# Altium PCB Power_BMS.PcbDoc (part 2 of 2)
Units mil, origin at the board's own origin, x right, y up, seen from the top; angles counter-clockwise.
Board outline 2370.27 x 1975.23 mil, 6 copper layers (Top Layer, Layer 1, GND, Power, Layer 2, Bottom Layer), stack 30.734 mil thick; 97 components, 67 nets, 345 pads, 132 vias.
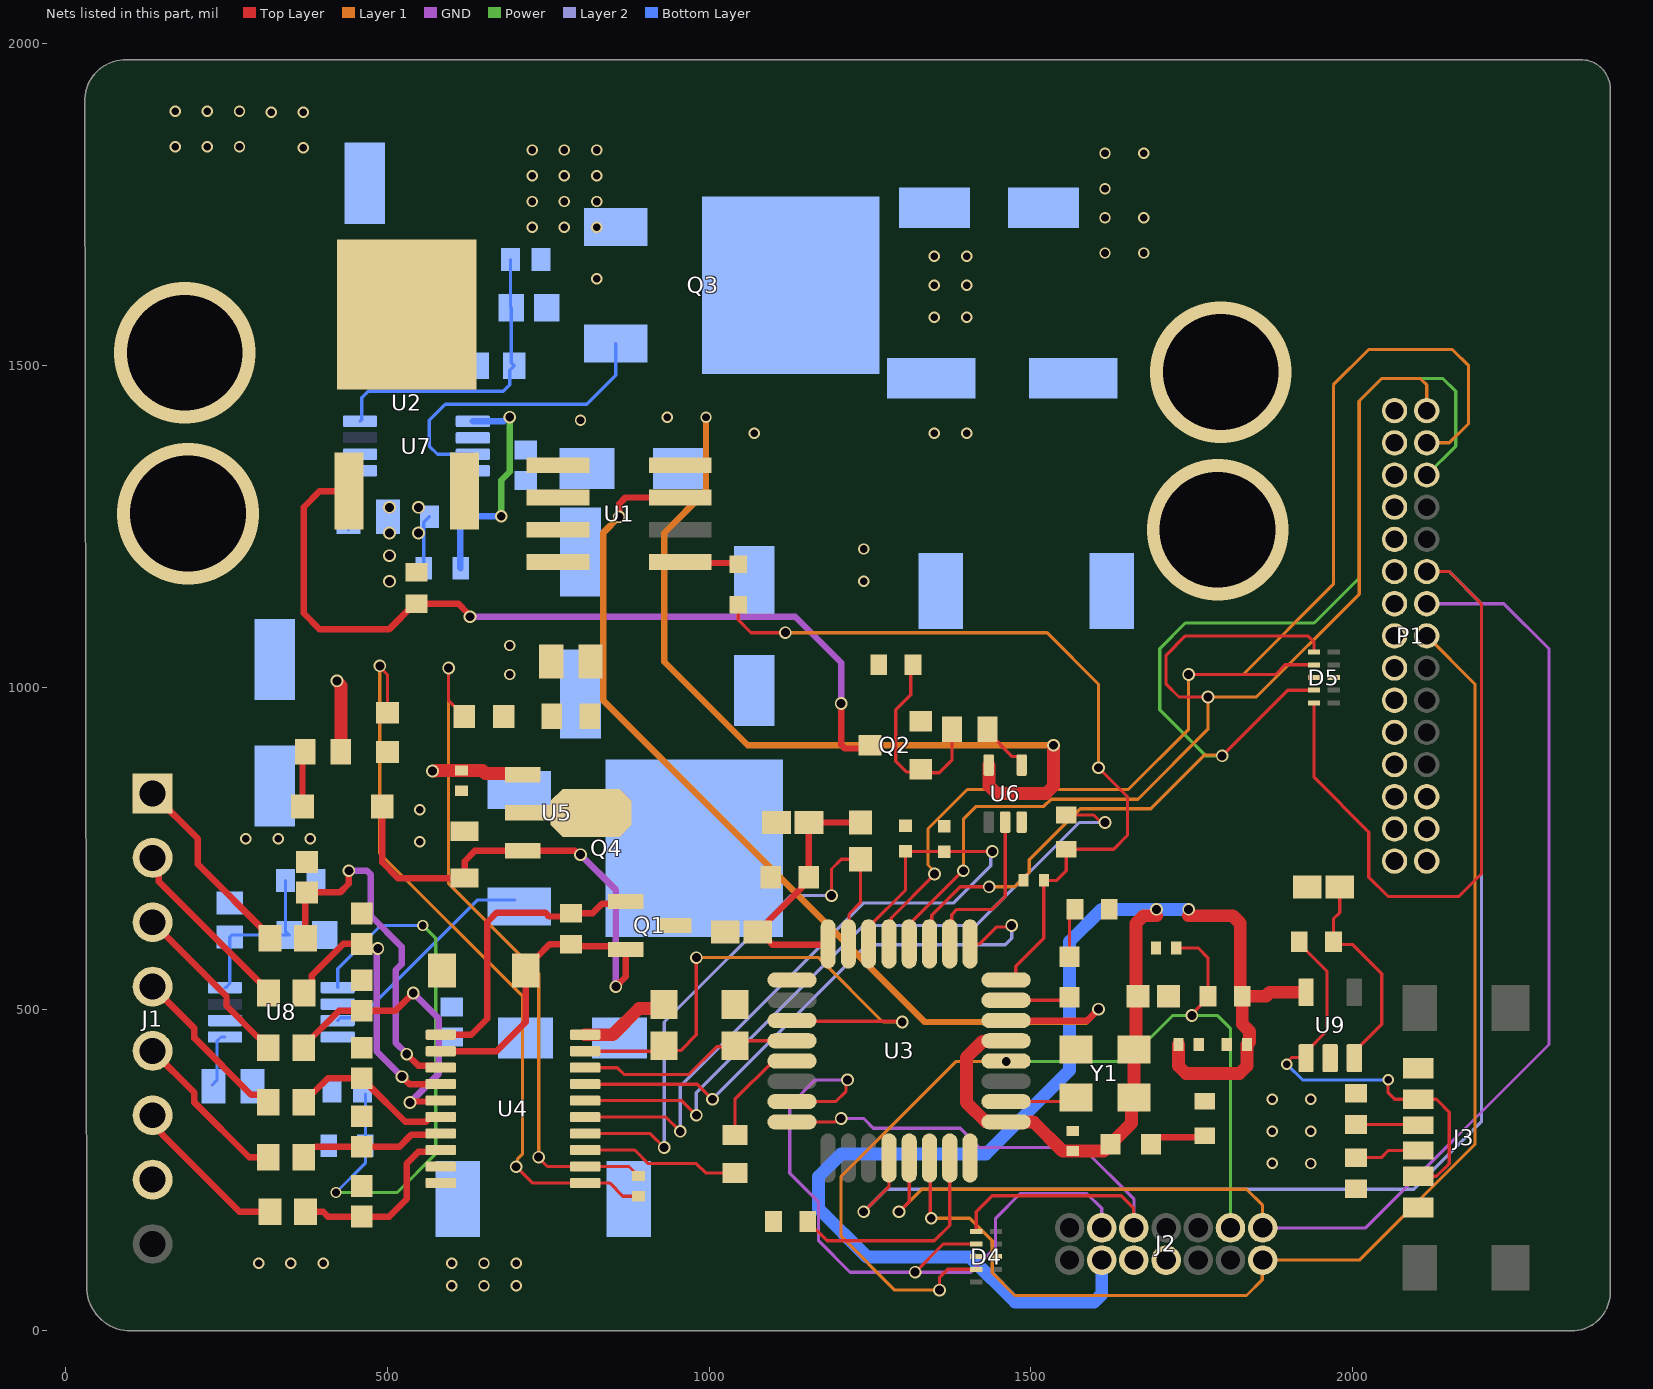
[diagram p6: the nets of this part, all layers, seen from the top]

## Part data (continued)
R6 R7 R8 R9 R10 R11: library part CMP-2000-03824-5, "Chip Resistor, 100 Ohm, +/- 1%, 100 mW,-55 to 155 degC, 0603 (1608 Metric), RoHS, Tape and Ree", Manufacturer="Vishay Semiconductor", ComponentLink1Description="Manufacturer URL", ComponentLink1URL=http://www.vishay.com/, ComponentLink2Description=Datasheet, ComponentLink2URL=http://www.vishay.com/docs/20035/dcrcwe3.pdf, DatasheetVersion=06/2012, Mounting Technology="Surface Mount", PackageDescription="2-Pin Surface Mount Device, Body 1.575 x 0.85 mm", PackageReference=0603
R12 R20: library part CMP-2000-01856-1, Manufacturer="KOA Speer", Part Number=RK73B1JTTD111J
R13 R15: library part CMP-2000-04828-3, "RES 1kΩ 1.00% 0.1W 0603", Case Code (Imperial)=0603, Case Code (Metric)=1608, Max Operating Temperature=155°C, Max Power Dissipation=100mW, Min Operating Temperature=-55°C, Package Quantity=1, Ratings=AEC-Q200, Resistance=1kR, Resistor Type="Thick Film", Temperature Coefficient=100ppm/°C, Tolerance=1%, Voltage Rating=50V, Case/Package=0603, Construction=Rectangular, Depth=0.8mm, Features="Moisture Resistant", Height=0.022inch, Lead Free="Lead Free", Length=0.063inch, Military Standard=Not, Number of Terminations=2, Packaging="Tape and Reel", Power Rating=100mW, RoHS Compliant=Yes, Series=AC, Size Code=0603, Termination=SMD/SMT, Width=0.031inch
R16 R17: library part CMP-2000-03059-2, "RES Thick Film, 200kΩ, 1%, 0.1W, 100ppm/°C, 0603", Case Code (Imperial)=0603, Case Code (Metric)=1608, Max Operating Temperature=155°C, Max Power Dissipation=100mW, Min Operating Temperature=-55°C, Package Quantity=10, Resistance=200kR, Temperature Coefficient=100ppm/°C, Tolerance=1%, Voltage Rating=75V, Case/Package=0603, Composition="Thick Film", Contact Plating=Tin, Depth=0.85mm, Features="Automotive AEC-Q200", Height=0.45mm, Lead Free="Lead Free", Length=1.55mm, Military Standard=Not, Mount="Surface Mount", Number of Terminations=2, Packaging="Tape and Reel", Power Rating=100mW, Radiation Hardening=No, Termination=SMD/SMT, Voltage Rating (DC)=75V, Weight=7.1E-05oz, Width=0.033inch, Working Voltage=75V
R19 R21: library part CMP-2100-03667-1, "Chip Resistor, 0 Ohm, +/- 5%, 0.1 W, -55 to 155 degC, 0603 (1608 Metric), RoHS, Tape and Reel", Case Code (Imperial)=0603, Case Code (Metric)=1608, Manufacturer=Yageo, Max Operating Temperature=155degC, Min Operating Temperature=-55degC, Package Description="2-Pin Surface Mount Device, Body 1.6 x 0.8 mm", Package Quantity=5000, Power Rating=100mW, Resistance=0mOhm, Temperature Coefficient=200ppm/degreesC, Tolerance=5%, Voltage Rating=50V, Case/Package=0603, Composition=ThickFilm, Contact Plating=Tin, Datasheet URL=http://www.yageo.com/NewPortal/yageodocoutput?fileName=/pdf/R-Chip/PYu-RC_Group_51_RoHS_L_5.pdf, Datasheet Version="Rev. 5, 10/2016", Depth=0.8mm, Height=0.45mm, Lead Free=LeadFree, Length=1.6mm, Manufacturer URL=http://www.yageo.com/, Military Standard=Not, Number of Pins=2, Package Reference=0603, Packaging=TapeandReel, Radiation Hardening=No, REACH SVHC=NoSVHC, RoHSCompliant=true, Termination=SMD/SMT, Voltage Rating (DC)=50V, Width=0.8mm
R23 R26: library part CMP-26527-007599-1, "RES 182K OHM 1% 1/10W 0603", Case Code (Imperial)=0603, Case Code (Metric)=1608, Max Operating Temperature=155°C, Max Power Dissipation=100mW, Min Operating Temperature=-55°C, Package Quantity=1, Ratings=AEC-Q200, Resistance=182kR, Resistor Type="Thick Film", Temperature Coefficient=100ppm/°C, Tolerance=1%, Case/Package=0603, Contact Plating=Tin, Features="Automotive AEC-Q200", Height=0.022inch, Lead Free="Lead Free", Length=0.061inch, Mount="Surface Mount", Number of Terminations=2, Packaging="Tape and Reel", Power Rating=100mW, Radiation Hardening=No, RoHS Compliant=Yes, Series=RMCF, Size Code=0603, Width=0.031inch
R24 R27: library part CMP-2000-00041-1, Manufacturer=Panasonic, Part Number=ERA3AEB333V
R25: library part CMP-2000-00318-1, Manufacturer=Panasonic, Part Number=ERJ-3EKF2002V
R28: library part CMP-2000-03860-1, Manufacturer="Vishay Dale", Part Number=CRCW060311K0FKEA
R30 R31: library part CMP-1012-00590-3, "RES Thick Film, 5.1kΩ, 1%, 0.1W, 100ppm/°C, 0603", Case Code (Imperial)=0603, Case Code (Metric)=1608, Max Operating Temperature=155°C, Min Operating Temperature=-55°C, Package Quantity=5000, Power Rating=100mW, Resistance=5.1kR, Temperature Coefficient=100ppm/°C, Tolerance=1%, Voltage Rating=75V, Case/Package=0603, Composition="Thick Film", Contact Plating=Tin, Depth=0.85mm, Height=0.45mm, Lead Free="Lead Free", Length=1.55mm, Military Standard=Not, Mount="Surface Mount", Packaging="Tape and Reel", Radiation Hardening=No, Termination=SMD/SMT, Voltage Rating (DC)=75V, Weight=7.1E-05oz, Width=0.85mm
R_NTC: library part CMP-05419-000001-1, "THERMISTOR NTC 10KOHM 3380K 0603", Case Code (Imperial)=0603, Case Code (Metric)=1608, Max Operating Temperature=125°C, Max Power Dissipation=100mW, Min Operating Temperature=-40°C, Package Quantity=4000, Resistance=10kR, Resistance Tolerance=1%, Accuracy=1%, Case/Package=0603, Depth=0.8mm, Height=0.8mm, Lead Free="Lead Free", Length=1.6mm, Mount="Surface Mount", Number of Pins=2, Packaging="Tape and Reel", Power Rating=100mW, Radiation Hardening=No, REACH SVHC="No SVHC", RoHS Compliant=Yes, Series=ERT-J, Termination=SMD/SMT, Tolerance=1%, Width=800um
R_sense R_sense_3v3 R_sense_5V: library part CMP-2001-03155-1, Manufacturer=Susumu, Part Number=RL1220S-R15-F
U1: "No Description Available", Mfr_Name="Texas Instruments", Supplier Part Number 1=296-TMCS1108A4BQDRCT-ND, RefDes=RefDes, Supplier 1=Digikey, Type=TYPE
U2: "No Description Available", Mfr_Name=onsemi, RefDes=RefDes, Type=Type
U3: library part CMP-0304-00067-2, "ARM Cortex-M0 32-bit MCU, 32 KB Flash, 4 KB Internal RAM, 26 I/Os, 32-Pin LQFP, -40 to 85 degC, Tape and Reel", I/Os (High Current)=26, Manufacturer=STMicroelectronics, Operating Frequency(F) (Processor speed) (MHz)=48, Package Description="32-Pin Low Profile Quad Flat Package, 7 x 7 mm Body, 0.8 mm Pitch", Package Reference=LQFP32, Supply Voltage(Vcc) min (V)=2.4, ComponentLink1Description="Manufacturer URL", ComponentLink1URL=http://www.st.com/, ComponentLink2Description=Datasheet, ComponentLink2URL=http://www.st.com/st-web-ui/static/active/en/resource/technical/document/datasheet/DM00088500.pdf, Core="ARM Cortex-M0", DatasheetVersion="Rev. 2", FLASH Size (Prog) (kB)=32, Internal RAM Size (kB)=4, Mounting Technology="Surface Mount", Packing="Tape and Reel", PartNumber=STM32F030K6T6TR
U4: library part CMP-0321-00736-2, "Analog Front End for 3 to 6 Series Lithium-Ion Cells, -25 to 85 degC, 20-pin TSSOP (PW), Green (RoHS & no Sb/Br)", Manufacturer="Texas Instruments", Over Voltage Protection=N, Code_JEDEC=MO-153, ComponentLink1Description=Datasheet, ComponentLink1URL=http://www.ti.com/general/docs/lit/getliterature.tsp?genericPartNumber=BQ76925&fileType=pdf, DatasheetVersion=SLUSAM9B, Eco-Plan="Green (RoHS & no Sb/Br)", Lead Acid=N, Li-Ion=Y, Li-Polymer=Y, Mounting Technology="Surface Mount", NiCd=N, NiMH=N, PackageDescription="20-Pin Plastic Thin Small Outline Package 6.5 x 4.4 mm Body ,0.65 mm Pitch", PackageReference=PW0020A, PackageVersion="revG, Feb-2011", PartNumber=BQ76925PWR, SubFamily="Lithium Ion Protection"
U5: library part CMP-0244-00410-1, "Positive Voltage Regulator, 3.3V, 4-Pin SOT-89, Tape and Reel", ComponentLink1Description="Manufacturer URL", ComponentLink1URL=http://www.st.com, ComponentLink2Description=Datasheet, ComponentLink2URL=http://www.st.com/internet/com/TECHNICAL_RESOURCES/TECHNICAL_LITERATURE/DATASHEET/CD00000446.pdf, DatasheetVersion=1/02/2011, PackageDescription="3-Pin SOT-89 Package 1.5 mm Pitch, 4.1 mm Lead Span", PackageReference=SOT-89, PackageVersion=2011
U6: library part CMP-0859-00252-3, "Single Inverter, DCK0005A, LARGE T&R", F @ Nom Voltage(Max)(Mhz)=150, Generic Part Number=SN74LVC1G04, ICC @ Nom Voltage(Max)(mA)=0.01, Manufacturer="Texas Instruments", Operating Temperature Range(C)="-40 to 125,-40 to 85", Rating=Catalog, tpd @ Nom Voltage(Max)(ns)=7.5,5.2,4.2,3.7, Voltage(Nom)(V)=1.8,2.5,3.3,5, 3-State Output=No, Bits(#)=1, DatasheetVersion=SCES214AD, Input Type=CMOS/TTL, Logic=Inverting, Output Drive (IOL/IOH)(Max)(mA)=32/-32, Output Type=CMOS, PackageReference=DCK0005A, Schmitt Trigger=No, Sub-Family="Inverting Buffer/Driver", Technology Family=LVC, VCC(Max)(V)=5.5, VCC(Min)(V)=1.65
U7 U8: library part CMP-0069-01740-3, "Hysteretic PFET Buck Controller with Enable Pin, 8-pin MSOP, Pb-Free", Manufacturer="Texas Instruments", PackageTopMarking=ZXTT*SKSB, PowerWise=N, Code_JEDEC=MO-187-AA, ComponentLink1Description="Datasheet URL", ComponentLink1URL=http://www.ti.com/general/docs/lit/getliterature.tsp?genericPartNumber=LM3489&fileType=pdf, CompType=Switcher, PackageDescription="MINI SOIC, .118 x .118 x .034in, 8 Lead, .0256in Pitch", PackageReference=DGK0008A, PinCount=8, RoHS=Y
U9: library part CMP-04917-000053-1, "IC REG LINEAR 3.3V 300MA SOT23-5", Dropout Voltage=125mV, Manufacturer="Texas Instruments", Max Junction Temp=+125°C, Max Supply Voltage=5.5V, Min Supply Voltage=1.4V, Nominal Supply Current=34uA, Output Current=300mA, Output Voltage=3.3V, Package=DBV0005A, Temperature="-40°C to +125°C", Temperature Range Low=-40°C, Accuracy Percentage=1%, Automotive=No, Category=IC, ComponentLink2Description=Datasheet, ComponentLink2URL=http://www.ti.com/lit/ds/symlink/tlv733p.pdf, Device Class L1="Integrated Circuits (ICs)", Device Class L2="Power Management ICs", Device Class L3="Voltage Regulators - Linear", Digikey Description="IC REG LINEAR 3.3V 300MA SOT23-5", Height=1.45mm, Lead Free=Yes, Manufacturer Part Number=TLV73333PDBVR, Mouser Description="LDO Voltage Regulators Capacitr-Free 300-mA 5-SOT-23 -40 to 125", Number Of Outputs=1, Octopart=https://octopart.com/tlv73333pdbvr-texas+instruments-51080890, Output Type=Fixed, RoHS=TRUE, Standoff Height=0mm, Temperature Range High=+125°C
Y1: "8 MHz XO (Standard) HCMOS Oscillator 1.62V ~ 3.63V Enable/Disable 4-SMD, No Lead", Package="ECS-3225MV-0-4 ECS", Check_prices=https://www.snapeda.com/parts/ECS-3225MV-080-BN-TR/ECS/view-part/?ref=eda, MF="ECS Inc.", MP=ECS-3225MV-080-BN-TR, SnapEDA_Link=https://www.snapeda.com/parts/ECS-3225MV-080-BN-TR/ECS/view-part/?ref=snap

## Via types
v1: diameter 17.72, hole 11.81, Top Layer to Bottom Layer, 69 vias
v2: diameter 19.68, hole 13.78, Top Layer to Bottom Layer, 56 vias
v3: diameter 220, hole 180, Top Layer to Bottom Layer, 4 vias
v4: diameter 124.02, hole 124.02, Top Layer to Bottom Layer, 3 vias

## Nets (pads, with @x,y where several pads share a name; then routed paths per layer and width w, separated by ;. In a path a pad name is that pad's centre, name@x,y a point inside that pad or via, vN(x,y) a via of type N, cw(c..) or ccw(c..) an arc to the next point about the centre after c; other vN are vias at no path point)
3v3_OUT: C22.1 C24.2 C27.1 L1.2 P1.26 P1.27 R24.2
  other v1: 825,1635 1615,1675 1675,1675 1615,1730 1675,1730 1615,1775 1615,1830 1675,1830
5V_IN: J3.A9 J3.B9 R29.2 U9.1 | length 685.2
  Top Layer w5: v1(1897.77,414.18) 1897.77,417.63 1905,424.85 1926.57,424.85 U9.1@1927.6,423.82 1927.6,433.66 1960,466.06 1960,558.7 1916.72,601.98 R29.2@1916.72,605 ; v1@2055,395 v1(2055,390) 2055,370 2065.16,359.84 J3.A9@2101.89,359.84 2130.16,359.84 2150,340 2150,260 2130.16,240.16 J3.B9@2101.89,240.16
  Bottom Layer w5: v1(1897.77,414.18) 1921.96,390 v1(2055,390)
5V_OUT: C30.1 C31.2 C33.1 L2.2 P1.29 P1.30 R27.2
  other v1: 600,70 650,70 700,70 600,105 650,105 700,105 1875,260.37 1935,260 1875,310.26 1935,310.26 1875,360 1935,360 550,760 550,810
+3V3: C1.2 C2.2 C3.2 C4.2 C5.2 C19.2 C21.2 C34.2 D1.2 J2.11 Q1.3 R2.1 R4.2 R5.2 U1.8 U3.1 U3.5 U3.17 U4.20 U5.1 U6.5 U9.5 Y1.1 Y1.4 | length 4397.6
  Top Layer w20: v2@575,870 575.75,870.75 C21.2@615,870.75 647.76,870.75 652.64,865.87 708.39,865.87 U5.1@710.2,864.06 ; U4.20@807.2,460.16 850.16,460.16 890.81,500.81 923.71,500.81 R5.2@930,507.1 ; C4.2@1102.3,787.74 C4.2@1104.56,790 ; U6.5@1434.41,879.29 1435,878.7 1435,846.72 1446.72,835 1523.28,835 1535,846.72 v2(1535,910) ; U3.1@1466.53,325.46 1429.21,325.46 1400,354.66 1400,425 1425.06,450.05 1475.65,450.05 U3.5@1476.28,450.69 ; U3.1@1476.34,324.76 1503.89,324.76 1549.41,279.25 C1.2@1565,279.25 1612.76,279.25 D1.2@1623.5,290 1656.28,322.78 1656.28,358.61 Y1.4@1660.28,362.6 Y1.1@1660.28,437.4 1663.32,440.44 1663.32,633.28 1675.03,645 1695,645 ; C2.2@1729.25,445 1729.25,411.72 1740.97,400 1824.03,400 1835.75,411.72 C34.2@1835.75,445 1839.59,448.84 1839.59,465.41 1828.28,476.72 R2.1@1828.28,520 ; 1745,645 1813.6,645 1825.32,633.28 1825.32,522.97 R2.1@1828.28,520 ; U9.5@1927.6,526.18 1871.18,526.18 1865,520 R2.1@1828.28,520
  Layer 1 w10: v1(995,1420) 995,1305 930,1240 930,1040 1060,910 v2(1535,910)
  Bottom Layer w20: J2.11@1610,111.82 1610,56.72 1598.28,45 1475,45 1405,115 1245,115 1170,190 1170,239.96 1205.04,275 1430,275 1560,405 1560,605 1610,655 v2(1695,655) v2(1745,655)
  other v1: 935,1420
  other v2: 570,870
ADC_REF: U3.9 U4.17 | length 872.7
  Top Layer w5: U4.17@807.2,383.39 981.61,383.39 v2(1005,360) ; U3.9@1405.24,601.34 1420.18,601.34 1446.55,627.71 1467.71,627.71 v2(1470,630)
  Layer 2 w5: v2(1005,360) 1245,600 1460,600 1470,610 v2(1470,630)
ADJ_3v3: C26.2 R23.1 U7.5 | length 365.1
  Power w10: v2(676.74,1265.93) 676.74,1321.74 690,1335 v2(690,1420)
  Bottom Layer w10: R23.1@613.54,1185 612.89,1185.65 612.89,1264.35 C26.2@612.24,1265 613.17,1265.93 v2(676.74,1265.93) ; U7.5@632.6,1413.39 680.77,1413.39 687.38,1420 v2(690,1420)
ADJ_5V: C32.2 R26.1 U8.5 | length 904.5
  Power w5: v1(420,215) 515,215 575,275 575,610 v1(555,630)
  Bottom Layer w5: v1(420,215) 465.75,260.75 C32.2@465.75,367.87 ; U8.5@422.6,533.39 422.6,562.6 490,630 v1(555,630)
BAT_VOLTAGE: C17.1 C20.1 D3.1 Q1.2 R16.1 U4.2 U5.3 | length 1137
  Top Layer w10: D3.1@492.01,815 492.01,727.99 516.42,703.58 C20.1@620,703.58 620,730 635.94,745.94 U5.3@710.2,745.94 791.43,745.94 797.38,740 v2(800,740) ; U4.2@582.8,434.57 669.57,434.57 714.96,479.96 C17.1@714.96,560 714.96,564.92 731.61,581.57 732.74,581.57 751.93,600.77 R16.1@785,600.77 788.17,597.6 Q1.2@867.6,597.6 ; v2(855,535) 870.2,550.2 Q1.2@870.2,592.6
  GND w10: v2(800,740) 855,685 v2(855,535)
Cell_1: C11.1 R6.2 U4.8 | length 288.4
  Top Layer w10: R6.2@372.56,185 400,185 407.42,177.58 C11.1@460,177.58 502.58,177.58 530,205 530,260 548.15,278.15 579.92,278.15 U4.8@582.8,281.02
Cell_2: C12.1 R7.2 U4.7 | length 223.1
  Top Layer w10: R7.2@372.56,275.51 382.72,285.67 387.95,285.67 388.57,286.29 518.71,286.29 537.42,305 581.18,305 U4.7@582.8,306.61
Cell_3: C13.1 R8.2 U4.6 | length 250.2
  Top Layer w10: R8.2@377.72,362.72 377.72,365.67 382.72,370.67 385.67,370.67 407.58,392.58 460.09,392.58 471.97,380.7 471.97,380.61 527.58,325 559.84,325 567.05,332.2 U4.6@582.8,332.2
Cell_4: C14.1 R9.2 U4.5 | length 458.1
  Top Layer w10: R9.2@370,442.95 424.63,497.58 C14.1@460,497.58 512.58,497.58 v2(540,525) ; v2(535,355) 536.4,356.4 581.4,356.4 U4.5@582.8,357.8
  GND w10: v2(535,355) 580,400 580,485 v2(540,525)
Cell_5: C15.1 R10.2 U4.4 | length 439.8
  Top Layer w10: R10.2@370.12,525 382.36,537.24 382.36,552.36 431.29,601.29 C15.1@460,601.29 467.13,594.16 v2(485.13,594.16) ; v2(522.62,395) 534.23,383.39 U4.4@582.8,383.39
  GND w10: v2(485.13,594.16) 483.47,592.5 483.47,564.68 483.11,564.32 483.11,434.51 v2(522.62,395)
Cell_6: C16.1 R11.2 U4.3 | length 571
  Top Layer w10: R11.2@372.56,610 372.56,678.85 C16.1@375,681.29 426.29,681.29 440,695 v2(440,715) ; v2(530,430) 548.15,411.85 579.92,411.85 U4.3@582.8,408.98
  GND w10: v2(440,715) 468.24,715 474.09,709.14 474.09,644.91 521.89,597.11 521.89,569.5 512.64,560.25 512.64,447.78 530,430.42 v2(530,430)
Cell_Voltage_ADC: C10.1 C36.1 U3.14 U4.15 | length 1165.1
  Top Layer w5: U4.15@807.2,332.2 932.8,332.2 v2(955,310) ; U3.14@1250,610 1250,630 1305,685 1305,740.63 1309.37,745 v2(1440,745)
  Layer 2 w5: v2(955,310) 955,380 1240,665 1380,665 1437.66,722.66 1437.66,742.66 v2(1440,745)
Current_ADC_MCU: U1.7 U3.6 | length 1530.9
  Top Layer w10: v2@860,1270 860,1285 870,1295 U1.7@955.02,1295 ; U3.6@1476.34,482.24 1587.24,482.24 v2(1605,500)
  Layer 1 w10: v2(860,1265) 835,1240 835,980 1335,480 1585,480 v2(1605,500)
Current_Voltage_ADC: C9.1 U3.15 U4.14 | length 899.9
  Top Layer w5: U4.14@807.2,306.61 908.39,306.61 v2(930,285) ; v2(1190,676.39) 1190,717.78 1205,732.78 C9.1@1235,732.78 1235,665 1217.22,647.22 1217.22,602.3 U3.15@1216.26,601.34
  Layer 2 w5: v2(930,285) 930,480 1126.39,676.39 v2(1190,676.39)
Fault_Alert: R21.1 U3.21 | length 172.6
  Top Layer w5: R21.1@1040,304.53 1040,360 1099.25,419.25 U3.21@1128.66,419.25
  Top Layer w10: R21.1@1040,304.53 R21.1@1043.94,304.53
FB_3v3: C27.2 R24.1 R25.2 U7.4 | length 476.3
  Bottom Layer w5: U7.4@457.4,1413.39 460,1415.98 460,1450 470,1460 680,1460 690,1470 690,1492.91 R25.2@697.09,1500 692.44,1504.65 R24.1@692.44,1590 691.38,1591.06 C27.2@691.38,1665
FB_5V: C33.2 R27.1 R28.2 U8.4 | length 263.6
  Bottom Layer w5: U8.4@247.4,533.39 248.64,533.39 255,539.74 R28.2@255,611.85 258.15,615 R27.1@347.44,615 341.38,621.06 C33.2@341.38,700
GND: C1.1 C2.1 C3.1 C4.1 C5.1 C6.1 C9.2 C10.2 C11.2 C12.2 C13.2 C14.2 C15.2 C16.2 C17.2 C19.1 C20.2 C21.1 C34.1 C35.1 C36.2 C_th.1 D4.3 D4.8 J1.7 J2.7 J2.9 J3.A12 J3.B12 Q2.2 R1.1 R3.1 R15.1 R18.1 R19.1 R22.1 R30.1 R31.2 R_NTC.1 R_sense.1 U1.5 U3.16 U3.32 U4.9 U4.10 U5.2 U6.3 U9.2 Y1.2 | length 500.3
  Top Layer w10: U1.5@955.02,1195 956.78,1193.25 1043.25,1193.25 R_NTC.1@1045,1191.5 ; C19.1@1075.22,620 C19.1@1079.53,620 ; C5.1@1154.53,705 1155,705.47 C4.1@1155,790 C9.2@1244.44,790 ; C5.1@1155.51,704.02 1143.78,692.28 1143.78,688.56 1092.48,637.27 1092.48,632.96 C19.1@1079.53,620 ; U3.16@1184.76,601.34 1183.64,600.22 1098.34,600.22 1092.48,606.08 1092.48,607.04 C19.1@1079.53,620
  other v3: 190,1270
"High_Side Switching": U3.10 U6.2 | length 257.3
  Top Layer w5: U3.10@1373.74,601.34 1376.89,604.49 1376.89,646.89 1385,655 1440,655 1460,675 U6.2@1460,790.71
I2C1_SCL: R5.1 U3.19 U4.19 | length 862.3
  Top Layer w5: U4.19@807.2,434.57 915,434.57 921.67,434.57 R5.1@925,434.57 ; R5.1@930,442.9 937.42,435.48 955.48,435.48 980,460 v2(980,580) ; U3.19@1128.66,482.24 1129.78,481.12 1298.88,481.12 v2(1300,480) v2@1299.29,479.29
  Top Layer w10: R5.1@915,445 915,434.57 915,427.9 R5.1@921.67,434.57
  Layer 1 w5: v2(980,580) 1170,580 1270,480 v2(1300,480)
I2C1_SDA: R4.1 U3.20 U4.18 | length 392.9
  Top Layer w5: U4.18@807.2,408.98 857.24,408.98 867.83,398.39 968.39,398.39 1011.46,441.46 R4.1@1040,441.46 ; R4.1@1056.63,426.27 R4.1@1040,442.9 1047.85,450.75 U3.20@1128.66,450.75
  Top Layer w10: R4.1@1040,441.46 R4.1@1055.91,425.55
ISEN1: R_sense_3v3.2 U7.1 | length 99
  Bottom Layer w5: R_sense_3v3.2@439.49,1245 439.49,1299.49 457.4,1317.4 U7.1@457.4,1336.61
ISEN2: R_sense_5V.2 U8.1 | length 86.4
  Bottom Layer w5: R_sense_5V.2@227.4,382.09 235,389.68 235,450.26 241.36,456.61 U8.1@247.4,456.61
Master_CS: D5.5 P1.12 U3.28 | length 3062.4
  Top Layer w5: v2(1240,185) 1279.25,224.25 U3.28@1279.25,268.66 ; D5.5@1940,975.94 1940,860 2025,775 2025,705 2055,675 2165,675 2200,710 2200,1130 2150,1180 P1.12@2115,1180
  Layer 2 w5: v2(1240,185) 1275,220 2095,220 2200,325 2200,1130 2150,1180 P1.12@2115,1180
MCU_Bootloader: R1.2 U3.31 | length 347.6
  Top Layer w5: R1.2@1153.28,170 1183.28,140 1350,140 1373.74,163.74 U3.31@1373.74,268.66
MCU_NRST: C6.2 D4.4 J2.4 R2.2 U3.4 | length 1545.2
  Top Layer w5: v2(1357.78,63.35) 1357.78,82.78 1370.63,95.63 D4.4@1415,95.63 ; C6.2@1725.75,595 1760,595 1775,580 R2.2@1775,520 1775,516.98 1750,491.98 v2(1750,490)
  Power w5: v2(1461.66,418.8) 1648.8,418.8 1720,490 v2(1750,490) 1790,490 1810,470 J2.4@1810,160
  Layer 1 w5: v2(1357.78,63.35) 1288.35,63.35 1205,146.7 1205,240 1383.8,418.8 v2(1461.66,418.8)
MCU_SWCLK: D4.1 J2.10 U3.24 | length 939.2
  Top Layer w5: U3.24@1143.66,324.76 1195.79,324.76 1201.03,330 v2(1205,330) ; D4.1@1415,154.69 1415,185 1440,210 1640,210 1659.5,190.5 1659.5,160.5 J2.10@1660,160
  GND w5: v2(1205,330) 1240,330 1255,315 1390,315 1420,285 1580,285 1660,205 J2.10@1660,160
MCU_SWDIO: D4.2 J2.12 U3.23 | length 1119.6
  Top Layer w5: U3.23@1143.66,356.26 1196.26,356.26 1212.66,372.66 1212.66,387.66 v2(1215,390) ; v2(1320,91.26) 1363.74,135 D4.2@1415,135
  GND w5: v2(1215,390) 1165,390 1125,350 1125,245 1170,200 1170,140 1218.76,91.24 1406.24,91.24 1445,130 1445,175 1483.47,213.47 1586.97,213.47 1610,190.44 J2.12@1610,160
NetC35_2: C35.2 R29.1 U9.3 | length 333.7
  Top Layer w5: C35.2@1980,690 1980,650 1970,640 R29.1@1970,605 1974.53,600.47 1999.53,600.47 2045,555 2045,476.26 2002.4,433.66 U9.3@2002.4,423.82
NetCR1_1: CR1.1 L1.1 Q3.4
NetCR2_1: CR2.1 L2.1 Q4.4
NetD1_1: D1.1 R3.2 | length 87.9
  Top Layer w10: D1.1@1686.5,290 1697.1,300.61 R3.2@1770,300.61
NetD2_1: D2.1 R18.2 | length 77
  Top Layer w5: D2.1@1560,581.5 1560,646.64 R18.2@1568.36,655
NetD3_2: D3.2 R12.2 | length 86.8
  Top Layer w10: D3.2@367.99,815 367.99,895.55 R12.2@372.44,900
NetJ1_1: J1.1 R11.1 | length 300.6
  Top Layer w10: J1.1@135,835 205,765 205,725.39 317.44,612.95 R11.1@317.44,610
NetJ1_2: J1.2 R10.1 | length 301.3
  Top Layer w10: J1.2@135,735 144.91,725.09 144.91,698.04 315,527.95 R10.1@315,525 R10.1@303.14,536.86
NetJ1_3: J1.3 R9.1 | length 271.4
  Top Layer w10: J1.3@115,639.88 J1.3@115,640 ; J1.3@135,635 249.88,520.12 249.88,505 299.21,455.67 302.17,455.67 314.88,442.95 R9.1@314.88,440
NetJ1_4: J1.4 R8.1 | length 263.2
  Top Layer w10: J1.4@135,535 200,470 200,455 288.02,366.98 302.91,366.98 R8.1@314.88,355
NetJ1_5: J1.5 R7.1 | length 259.6
  Top Layer w10: J1.5@135,435 200,370 200,355 285,270 R7.1@314.88,270 R7.1@317.44,270
NetJ1_6: J1.6 R6.1 | length 253.4
  Top Layer w10: J1.6@135,335 135,320.98 149.96,306.02 149.96,305.04 270,185 R6.1@317.44,185
NetJ3_A5: J3.A5 R31.1 | length 101.5
  Top Layer w5: R31.1@2005,269.23 2044.23,269.23 2055.31,280.32 J3.A5@2101.89,280.32
NetJ3_B5: J3.B5 R30.2 | length 97.3
  Top Layer w5: R30.2@2005,320.77 2100.8,320.77 J3.B5@2101.89,319.68
NetQ2_1: Q2.1 R20.2 R22.2 | length 313
  Top Layer w5: R22.2@1313.28,1035 1313.28,988.28 1290,965 1290,885 1306.45,868.55 1327.63,868.55 1328.74,867.44 1357.44,867.44 1377.44,887.44 R20.2@1377.44,935 ; R20.2@1377.44,948.25 R20.2@1377.44,951.06
NetQ2_3: Q2.3 R17.1 U2.1 | length 1317.1
  Top Layer w10: U2.1@440,1305 395,1305 370,1280 370,1115 395,1090 502.33,1090 542.5,1130.17 R17.1@545,1130.17 609.83,1130.17 v2@625,1115 ; v2(1205,975) 1205,910.86 1210.86,905 Q2.3@1252.09,905
  GND w10: v2(628.15,1109.76) 1133.59,1109.76 1205,1038.35 v2(1205,975)
NetR20_1: R20.1 U6.4 | length 83
  Top Layer w5: R20.1@1432.56,935 1432.56,931.06 1471.19,892.43 1480.22,892.43 1485.59,887.06 U6.4@1485.59,879.29
NetR21_2: R21.2 U4.13 | length 247.5
  Top Layer w5: U4.13@807.2,281.02 883.98,281.02 905,260 980,260 994.53,245.47 R21.2@1040,245.47
Pack+: R12.1 U1.1 U1.2 | length 106.1
  Top Layer w20: v2@425,1005 427.56,1002.44 R12.1@427.56,900
  other v1: 800,1415 369.38,1838.55 170,1840 220,1839.79 270,1840 319.38,1893.55 369.38,1893.55 170,1895 220,1895 270,1895
  other v2: 421.5,1010.05
  other v3: 185,1520
"Pack+ Sensor Out": R17.2 U1.3 U1.4 U2.3 | length 2.5
  Top Layer w20: R17.2@545,1178.63 R17.2@547.5,1178.63
Pack-: C22.2 C23.1 C24.1 C25.2 C28.1 C29.2 C30.2 C31.1 CR1.2 CR2.2 D5.3 D5.8 P1.1 P1.3 P1.5 P1.7 P1.9 P1.11 P1.13 P1.15 P1.17 P1.19 P1.21 P1.23 P1.25 P1.28 R13.1 R19.2 R25.1 R28.1 R_sense.2 U7.2 U7.6 U8.2 U8.6 | length 1.4
  Top Layer w20: R_sense.2@754.49,1040 R_sense.2@754.98,1039.51 ; R19.2@754.98,955.49 R19.2@755.47,955
  other v1: 690,1020 690,1065 1240,1165 1240,1215 1070,1395 1350,1395 1400,1395 1350,1575 1400,1575 1350,1625 1400,1625 1350,1670 1400,1670
  other v3: 1790,1245
PFET1_Gate: Q3.1 U7.7 | length 481.3
  Bottom Layer w5: U7.7@632.6,1362.2 577.8,1362.2 565,1375 565,1415 590,1440 810,1440 854.88,1484.88 Q3.1@854.88,1534.45
PFET2_Gate: Q4.1 U8.7 | length 353.3
  Bottom Layer w5: U8.7@422.6,482.2 427.07,486.67 456.67,486.67 639.45,669.45 Q4.1@698.35,669.45
SENSEN: C18.1 R15.2 U4.11 | length 1160.5
  Top Layer w5: v2@487.42,1032.58 500,1020 R15.2@500,960.58 ; v2(700,255) 725.16,229.84 845.16,229.84 865.75,209.25 C18.1@890,209.25
  Layer 1 w5: v2(488.19,1033.34) 488.19,741.81 710,520 710,275 702.26,267.26 702.26,257.26 v2(700,255)
SENSEP: C18.2 R13.2 U4.12 | length 1074.6
  Top Layer w5: v2@595,1033.77 v2(595,1030) 595,979.42 R13.2@619.42,955 ; v2(735,270) 735,268.93 748.49,255.43 U4.12@807.2,255.43 875.31,255.43 C18.2@890,240.75
  Layer 1 w5: v2(595,1030) 595,695 735,555 v2(735,270)
SPI1_CLK: D5.4 P1.6 U3.11 | length 1969
  Top Layer w5: U3.11@1342.24,601.34 1345.81,604.9 1345.81,645.81 1390,690 v2(1435,690) ; v2(1797.05,893.52) 1899.17,995.63 D5.4@1940,995.63
  Power w5: v2(1797.05,893.52) 1771.48,893.52 1700,965 1700,1060 1740,1100 1940,1100 2010,1170 2010,1445 2045,1480 2140,1480 2160,1460 2160,1375 P1.6@2115,1330
  Layer 1 w5: v2(1435,690) 1475,690 1497.34,712.34 1497.34,732.34 1576.28,811.28 1686.28,811.28 1770,895 v2@1795,895
SPI1_MISO: D5.1 P1.2 U3.12 | length 1862.3
  Top Layer w5: U3.12@1310.75,601.34 1310.75,631.96 1393.79,715 v2(1395,715) ; v2(1775,985) 1730,985 1710,1005 1710,1050 1740,1080 1930,1080 1940,1070 D5.1@1940,1054.69
  Layer 1 w5: v2(1395,715) 1395,795 1415,815 1520,815 1531.28,826.28 1666.28,826.28 1775,935 v2(1775,985) 1850,985 2010,1145 2010,1445 2045,1480 2105,1480 2115,1470 P1.2@2115,1430
SPI1_MOSI: D5.2 P1.4 U3.13 | length 1971.1
  Top Layer w5: U3.13@1279.25,601.34 1282.82,604.9 1282.82,641.6 1350,708.79 v2(1350,710) ; v2(1745,1020) 1880,1020 1895,1035 D5.2@1940,1035
  Layer 1 w5: v2(1350,710) 1350,713.97 1340,723.97 1340,780 1401.28,841.28 1651.28,841.28 1745,935 v2(1745,1020) 1830,1020 1970,1160 1970,1470 2025,1525 2155,1525 2180,1500 2180,1410 2150,1380 P1.4@2115,1380
Status_LED_Control: D2.2 U3.7 | length 85.6
  Top Layer w5: U3.7@1476.34,513.74 1555.24,513.74 D2.2@1560,518.5
Temp_ADC_MCU: C_th.2 R_NTC.2 R_th.1 U3.8 | length 1229.9
  Top Layer w5: R_NTC.2@1045,1128.5 1045,1105 1065,1085 v2(1118.39,1085) ; U3.8@1476.34,545.24 1476.34,566.34 1520,610 C_th.2@1520,700 1540,700 1555,715 R_th.1@1555,748.36 1628.36,748.36 1650,770 1650,830 v2(1605,875)
  Layer 1 w5: v2(1118.39,1085) 1525,1085 1605,1005 v2(1605,875)
Thermistor_Bias: R_th.2 U4.16 | length 1093.4
  Top Layer w5: U4.16@807.2,357.8 957.2,357.8 v2(980,335) ; R_th.2@1553.36,800 R_th.2@1554.18,800.82 ; R_th.2@1555,801.64 1597.25,801.64 1608.9,790 v2(1615,790)
  Top Layer w10: R_th.2@1554.18,800.82 R_th.2@1555,801.64
  Layer 2 w5: v2(980,335) 980,370 1240,630 1415,630 1575,790 v2(1615,790)
Transistor_CTL: Q1.1 R16.2 U4.1 | length 465
  Top Layer w10: U4.1@582.8,460.16 630.16,460.16 655,485 655,635 670,650 745,650 751.09,643.91 782.31,643.91 R16.2@784.96,646.57 ; R16.2@785,649.23 819.23,649.23 833.51,663.51 866.3,663.51 Q1.1@870.2,667.4
UART_RX: J2.1 P1.16 U3.30 | length 1954.8
  Top Layer w5: U3.30@1342.24,268.66 1343.62,267.28 1343.62,176.38 v2(1345,175)
  Layer 1 w5: v2(1345,175) 1405,175 1440,140 1440,90 1475,55 1835,55 1859.5,79.5 1859.5,109.5 J2.1@1860,110 2010,110 2190,290 2190,1005 P1.16@2115,1080
UART_TX: J2.2 P1.14 U3.29 | length 2112.1
  Top Layer w5: v2(1295,185) 1310.75,200.75 U3.29@1310.75,268.66
  GND w5: J2.2@1860,160 2020,160 2305,445 2305,1060 2235,1130 P1.14@2115,1130
  Layer 1 w5: v2(1295,185) 1330,220 1835,220 1860,195 J2.2@1860,160
VIN: C23.2 C25.1 C26.1 C28.2 C29.1 C32.1 Q3.3 Q4.3 R23.2 R26.2 R_sense_3v3.1 R_sense_5V.1 U2.4 U7.8 U8.8 | length 83.5
  Bottom Layer w5: R23.2@556.46,1185 556.46,1256.46 C26.1@565,1265
  other v1: 300,105 350,105 400,105 280,765 330,765 380,765 725,1715 775,1715 825,1715 725,1755 775,1755 825,1755 725,1795 775,1795 825,1795 725,1835 775,1835 825,1835
  other v2: 503.15,1164.76 503.15,1204.76 503.15,1239.76 548.15,1239.76 503.15,1279.76 548.15,1279.76
  other v3: 1795,1490
XTAL: U3.2 Y1.3 | length 96
  Top Layer w5: U3.2@1476.34,356.26 1563.39,356.26 Y1.3@1569.72,362.6
pads on no net: D4.5 D4.6 D4.7 D4.9 D4.10 D5.6 D5.7 D5.9 D5.10 J1.8 J2.3 J2.5 J2.6 J2.8 J2.13 J2.14 J3.S1 J3.S2 J3.S3 J3.S4 P1.8 P1.10 P1.18 P1.20 P1.22 P1.24 U1.6 U3.3 U3.18 U3.22 U3.25 U3.26 U3.27 U6.1 U7.3 U8.3 U9.4
copper on no net:
  other v4: 1006.61,134.51 1790,1700 190,1725

## Polygon pours and split planes (outlines as drawn)
GND on Top Layer "Pack+" (solid, remove dead copper, pour order 65): 1395,195 1395,315 1395,610 1275,610 1190,695 1190,1425 2400,1425 2400,5 2.57,5 2.57,1395 415,1395 415,1150 640,1150 640,915 791.81,915 791.81,1230 1000.01,1230 1000.01,1175 900,1175 900,196.38 901.38,195
Pack- on Top Layer "Pack-" (solid, remove dead copper, pour order 39): 1655,1360 1945,1360 1945,1510 1980,1545 2160,1545 2160,650 2130,620 2125,625 2045,625 2045,695 1875,865 1735,865 1655,945
"Pack+ Sensor Out" on Top Layer "GND" (solid, remove dead copper, pour order 41): 706.37,1385 706.37,1358.87 706.37,1267.25 810,1267.25 810,1095 375,1095 375,1385
VIN on Top Layer "VIN" (solid, remove dead copper, pour order 79): 1190,1585 1190,1425 2400,1425 2400,1980.01 405,1980.01 405,1385 705,1385 705,1585 1020,1585
Pack+ on Top Layer "GND_Return" (solid, remove dead copper, pour order 42): -2.35,1395 405,1395 405,1980.01 1.07,1980.01
+3V3 on Top Layer "+3v3" (solid, remove dead copper, pour order 66): 900,1585 900,475 1145,475 1195,525 1270,525 1270,610 1210,670 1190,670 1190,1585
Pack- on Top Layer "Pack-" (solid, remove dead copper, pour order 40): 790,915 640,915 640,1145 790,1145
+3V3 on Top Layer "+3v3" (solid, remove dead copper, pour order 67): 1020,1315 1020,1585 915,1585 915,1465 835,1385 835,1315
Pack+ on Top Layer "Pack+" (solid, remove dead copper, pour order 43): 705,1270 835,1270 835,1385 910,1460 910,1585 705,1585
GND on GND "GND" (solid, remove dead copper, pour order 64): 2.57,1974.8 2.57,10.41 2400,10.41 2400,1979.52
Pack+ on GND "Pack+" (solid, remove dead copper, pour order 44): 405,1390 370,1390 395,1365 395,995 445,995 445,1390
Pack+ on GND "Pack+" (solid, remove dead copper, pour order 38): 29.87,1974.98 29.87,1345 795,1345 915,1465 915,1974.98
+3V3 on GND "+3v3" (solid, remove dead copper, pour order 58): 915,1585 1020,1585 1020,1315 645,940 645,845 530,845 530,1080 915,1465
Pack- on Bottom Layer "Pack-" (solid, remove dead copper, pour order 72): 970,5 675,5 675,135 970,135 970,470 955,485 740,485 675,420 675,5 580,5 2.57,5 2.57,1974.98 2400,1974.98 2400,945 225,945 225,720 450,720 675,945 2400,945 2400,5
VIN on Bottom Layer "VIN" (solid, remove dead copper, pour order 52): 475,1044.79 610,1044.79 610,1244.79 650,1284.79 750,1284.79 750,1345 475,1345
3v3_OUT on Bottom Layer "3v3_OUT" (solid, remove dead copper, pour order 54): 2050,1555 2085,1520 2215,1520 2260,1475 2260,695 2066.65,695 2030,731.65 2030,845 2055,870 2145,870 2145,1440 2150,1445 2050,1445 2050,1220 1695,1220 1695,1075 1460,1075 1460,1890 2050,1890
VIN on Bottom Layer "VIN" (solid, remove dead copper, pour order 57): 1025,1670 1025,1885 280,1885 280,1670
VIN on Bottom Layer "VIN" (solid, remove dead copper, pour order 50): 280.43,410.68 280.43,80 430.43,80 430.43,380.68 455.43,405.68 640,405.68 640,465.68 335.43,465.68
5V_OUT on Bottom Layer "5V_OUT" (solid, remove dead copper, pour order 55): 1855,445 2050,445 2050,230 1660,230 1660,910 765,910 765,1035 1855,1035
5V_OUT on Bottom Layer "5V_OUT" (solid, remove dead copper, pour order 47): 575,265 685,265 685,170 730,125 785,125 785,60 780,55 575,55
VIN on Bottom Layer "VIN" (solid, remove dead copper, pour order 46): 520,730 520,735 520,805 760,805 760,940 230,940 230,730
5V_OUT on Bottom Layer "5V_OUT" (solid, remove dead copper, pour order 48): 365,720 520,720 520,835 600,835 600,565 560,525 365,525
NetCR2_1 on Bottom Layer "NetCR1_1" (solid, remove dead copper, pour order 49): 830,425 830,145 915,145 915,425 1110,425 1110,670 830,670
3v3_OUT on Bottom Layer "3v3_OUT" (solid, remove dead copper, pour order 71): 955,1692.5 955,1587.5 840,1587.5 840,1452.5 720,1452.5 720,1597.5 715,1602.5 715,1692.5
NetCR1_1 on Bottom Layer "NetCR1_1" (solid, remove dead copper, pour order 59): 1220,1370 1365,1370 1394.45,1340.55 1394.45,1092.41 1315.55,1092.41 1220,1187.96 1220,1295 900,1295 900,1395 1075,1395 1075,1760 1220,1760
Pack- on Power "Pack-" (solid, remove dead copper, pour order 78): 41.27,1975 2400,1975 2400,0 25,0 15,10
5V_OUT on Power "5V_OUT" (solid, remove dead copper, pour order 73): 1839.31,500 2020,680.69 2020,730 2045,755 2140,755 2165,730 2165,590 2075,500 2075,5 452.53,5 447.53,835 780,835 780,220 870,130 1505,130 1835,130 1835,245 1835,500
VIN on Power "VIN" (solid, remove dead copper, pour order 74): 465,1135 580,1135 580,1755 640,1815 800,1815 800,1890 795,1885 460,1885
3v3_OUT on Power "+3v3_OUT" (solid, remove dead copper, pour order 63): 800,1890 800,1510 1825.31,1510 2075,1510 2075,1890
+3V3 on Power "+3v3" (solid, remove dead copper, pour order 70): 1500,940 1830,940 1830,600 1660,600 1660,880 1500,880
GND on Layer 2 "GND" (solid, remove dead copper, pour order 76): 0,1974.98 660.02,1974.98 665,1970 665,965 640,940 230,940 230,730 230.49,729.51 232.87,731.89 446.89,731.89 540,825 635,825 660,800 660,270 265,270 265,70 890,70 890,0 55,0 0,55
Pack- on Layer 2 "Pack-" (solid, remove dead copper, pour order 75): 890,1864.51 1000.49,1975 2400,1975 2400,0 890,0
VIN on Layer 2 "VIN" (solid, remove dead copper, pour order 56): 805,1975 1920,1975 1920,1500 890,1500 890,70 265,70 265,270 660,270 660,800 635,825 540,825 446.27,731.27 446.27,729.51 230.49,729.51 230,730 230,940 640,940 665,965 665,1975
GND on Layer 1 "GND" (solid, remove dead copper, pour order 68): 2400,1975 2400,5 -5,5 -5,1975

## Keep-outs
Keep-Out Layer:
  lines w40: 25,85 ccw(c110.34,85.34) 110.68,0 2340,0 ccw(c2337.5,62.5) 2400,65 2400,1925 ccw(c2345,1920) 2340,1975 110,1975 ccw(c107.5,1892.5) 25,1895 25,85

## Silkscreen, mask and mechanical layers (free items; w line width, h text height)
Top Overlay:
  drawing of 17 lines, arcs and shapes, not listed
  text "Project Polarity" at 1147.5,1830 h65
  text "Power Delivery Board Rev. 2" at 1137.5,1720 h65
  text "Out +" at 1955,1480.39 h35
  text "In+" at 305,1460 h35
  text "Out -" at 1960,1220.39 h35
  text "In -" at 325,1195 h35
  text "Cell 6" at 205,835.39 h35
  text "Cell 5" at 205,730.39 h35
  text "Cell 4" at 205,630.39 h35
  text "Cell 3" at 205,530.39 h35
  text "Cell 2" at 205,425.39 h35
  text "Cell 1" at 210,330.39 h35
  text "GND" at 210,220.39 h35
  text "NC" at 225,125.39 h35
Mechanical 1:
  lines w10: 94.98,1974.98 ccw(c92.41,1912.43) 29.87,1915 32.6,75 ccw(c101.64,69.04) 95.68,0 2345,0 ccw(c2340,60) 2400,65 2400,1935 ccw(c2355,1930) 2350,1975 95,1975 ; 94.98,1974.98 95,1975

## Text inside footprints (layer, text, board x,y; h text height)
C22: Bottom Overlay "+" at 1646.18,1499.68 h48 r180
U2: Top 3D Body "*" at 427.5,1365 h50; Top Overlay "*" at 344.92,1280 h50